# EAGLE board CT_schematic (EAGLE 7.6.0)

Size 100 x 80 mm. Coordinates in mm from the lower left corner, seen from the top.
Outline: 0,0 100,0 100,80 0,80 0,0
Copper layers (1*16): Top 0.035mm / dielectric 1.5mm / Bottom 0.035mm
Design rules "default": minimum track width 10mil, minimum drill 24mil, track to track 8mil, track to pad 8mil, pad to pad 8mil, via to via 8mil, smd to smd 8mil, copper to edge 40mil, drill to drill 8mil, minimum pad ring 10mil, minimum via ring 8mil, stop-mask expansion 4mil, vias tented up to drill 0mil, thermal gap 10mil

## Footprints (pad centres in the part's own frame; a part is rotated, then mirrored left to right if it is on the bottom)
C0603 = smd 0.8 x 0.8: 1 -0.762,0; 2 0.762,0
C0402 = smd 0.5 x 0.5: 1 -0.508,0; 2 0.508,0
C0805 = smd 1.2 x 1.3: 1 -1.016,0; 2 1.016,0
C1210 = smd 1.2 x 2.5: 1 -1.524,0; 2 1.524,0
C1206 = smd 1.3 x 1.6: 1 -1.524,0; 2 1.524,0
EXV-9H = smd 3.505 x 1.676: 1 -2.857,0; 2 2.857,0
L0603 = smd 0.8 x 0.8: 1 -0.762,0; 2 0.762,0
L1210 = smd 1.2 x 2.5: 1 -1.524,0; 2 1.524,0
PJ-037B_PACKAGE = drill 3.7 square: 1 12,0 | drill 3.2 square: 2 6,0
R0603 = smd 0.8 x 0.8: 1 -0.762,0; 2 0.762,0
LQFP176 = smd 0.3 x 1.2: 1 -10.75,-12.75; 2 -10.25,-12.75; 3 -9.75,-12.75; 4 -9.25,-12.75; 5 -8.75,-12.75; 6 -8.25,-12.75; 7 -7.75,-12.75; 8 -7.25,-12.75; 9 -6.75,-12.75; 10 -6.25,-12.75; 11 -5.75,-12.75; 12 -5.25,-12.75; 13 -4.75,-12.75; 14 -4.25,-12.75; 15 -3.75,-12.75; 16 -3.25,-12.75; 17 -2.75,-12.75; 18 -2.25,-12.75; 19 -1.75,-12.75; 20 -1.25,-12.75; 21 -0.75,-12.75; 22 -0.25,-12.75; 23 0.25,-12.75; 24 0.75,-12.75; 25 1.25,-12.75; 26 1.75,-12.75; 27 2.25,-12.75; 28 2.75,-12.75; 29 3.25,-12.75; 30 3.75,-12.75; 31 4.25,-12.75; 32 4.75,-12.75; 33 5.25,-12.75; 34 5.75,-12.75; 35 6.25,-12.75; 36 6.75,-12.75; 37 7.25,-12.75; 38 7.75,-12.75; 39 8.25,-12.75; 40 8.75,-12.75; 41 9.25,-12.75; 42 9.75,-12.75; 43 10.25,-12.75; 44 10.75,-12.75; 89 10.75,12.75; 90 10.25,12.75; 91 9.75,12.75; 92 9.25,12.75; 93 8.75,12.75; 94 8.25,12.75; 95 7.75,12.75; 96 7.25,12.75; 97 6.75,12.75; 98 6.25,12.75; 99 5.75,12.75; 100 5.25,12.75; 101 4.75,12.75; 102 4.25,12.75; 103 3.75,12.75; 104 3.25,12.75; 105 2.75,12.75; 106 2.25,12.75; 107 1.75,12.75; 108 1.25,12.75; 109 0.75,12.75; 110 0.25,12.75; 111 -0.25,12.75; 112 -0.75,12.75; 113 -1.25,12.75; 114 -1.75,12.75; 115 -2.25,12.75; 116 -2.75,12.75; 117 -3.25,12.75; 118 -3.75,12.75; 119 -4.25,12.75; 120 -4.75,12.75; 121 -5.25,12.75; 122 -5.75,12.75; 123 -6.25,12.75; 124 -6.75,12.75; 125 -7.25,12.75; 126 -7.75,12.75; 127 -8.25,12.75; 128 -8.75,12.75; 129 -9.25,12.75; 130 -9.75,12.75; 131 -10.25,12.75; 132 -10.75,12.75 | smd 1.2 x 0.3: 45 12.75,-10.75; 46 12.75,-10.25; 47 12.75,-9.75; 48 12.75,-9.25; 49 12.75,-8.75; 50 12.75,-8.25; 51 12.75,-7.75; 52 12.75,-7.25; 53 12.75,-6.75; 54 12.75,-6.25; 55 12.75,-5.75; 56 12.75,-5.25; 57 12.75,-4.75; 58 12.75,-4.25; 59 12.75,-3.75; 60 12.75,-3.25; 61 12.75,-2.75; 62 12.75,-2.25; 63 12.75,-1.75; 64 12.75,-1.25; 65 12.75,-0.75; 66 12.75,-0.25; 67 12.75,0.25; 68 12.75,0.75; 69 12.75,1.25; 70 12.75,1.75; 71 12.75,2.25; 72 12.75,2.75; 73 12.75,3.25; 74 12.75,3.75; 75 12.75,4.25; 76 12.75,4.75; 77 12.75,5.25; 78 12.75,5.75; 79 12.75,6.25; 80 12.75,6.75; 81 12.75,7.25; 82 12.75,7.75; 83 12.75,8.25; 84 12.75,8.75; 85 12.75,9.25; 86 12.75,9.75; 87 12.75,10.25; 88 12.75,10.75; 133 -12.75,10.75; 134 -12.75,10.25; 135 -12.75,9.75; 136 -12.75,9.25; 137 -12.75,8.75; 138 -12.75,8.25; 139 -12.75,7.75; 140 -12.75,7.25; 141 -12.75,6.75; 142 -12.75,6.25; 143 -12.75,5.75; 144 -12.75,5.25; 145 -12.75,4.75; 146 -12.75,4.25; 147 -12.75,3.75; 148 -12.75,3.25; 149 -12.75,2.75; 150 -12.75,2.25; 151 -12.75,1.75; 152 -12.75,1.25; 153 -12.75,0.75; 154 -12.75,0.25; 155 -12.75,-0.25; 156 -12.75,-0.75; 157 -12.75,-1.25; 158 -12.75,-1.75; 159 -12.75,-2.25; 160 -12.75,-2.75; 161 -12.75,-3.25; 162 -12.75,-3.75; 163 -12.75,-4.25; 164 -12.75,-4.75; 165 -12.75,-5.25; 166 -12.75,-5.75; 167 -12.75,-6.25; 168 -12.75,-6.75; 169 -12.75,-7.25; 170 -12.75,-7.75; 171 -12.75,-8.25; 172 -12.75,-8.75; 173 -12.75,-9.25; 174 -12.75,-9.75; 175 -12.75,-10.25; 176 -12.75,-10.75
10100565 = smd 0.8 x 2.35: 1 0,0; 2 1.25,0; 3 2.55,0; 4 4.25,0; 5 5.43,0; 6 6.68,0; 7 7.93,0; 8 9.18,0; 9 11.67,0; 10 14.18,0; 11 15.43,0; 12 16.68,0; 13 17.93,0; 14 19.18,0; 15 21.68,0 | smd 1.5 x 3.1: 16 23.495,-1.375; 20 25.685,-22.875 | smd 1.55 x 3.1: 17 -1.815,-1.375; 21 -1.815,-22.875 | drill 1.1 pad 1.1: 18 21.68,-2.375; 19 0.68,-2.375
SAMTEC_FTSH-105-01-L-DV-K = smd 0.762 x 2.794: 1 -2.54,-2.032; 2 -2.54,2.032; 3 -1.27,-2.032; 4 -1.27,2.032; 5 0,-2.032; 6 0,2.032; 7 1.27,-2.032; 8 1.27,2.032; 9 2.54,-2.032; 10 2.54,2.032
SSOP-16 = smd 1.981 x 0.356: 1 -2.464,2.223; 2 -2.464,1.587; 3 -2.464,0.953; 4 -2.464,0.318; 5 -2.464,-0.318; 6 -2.464,-0.953; 7 -2.464,-1.587; 8 -2.464,-2.223; 9 2.464,-2.223; 10 2.464,-1.587; 11 2.464,-0.953; 12 2.464,-0.318; 13 2.464,0.318; 14 2.464,0.953; 15 2.464,1.587; 16 2.464,2.223
182-009-MALE = drill 1.194 pad 1.524 octagon: 1 -5.537,10.923; 2 -2.769,10.923; 3 0,10.923; 4 2.769,10.923; 5 5.537,10.923; 6 -4.153,8.08; 7 -1.384,8.08; 8 1.384,8.08; 9 4.153,8.08 | hole 3.048: -12.446,9.501; 12.446,9.501
QFN-28 = smd 0.813 x 0.305: 1 -2.451,1.5; 2 -2.451,1; 3 -2.451,0.5; 4 -2.451,0; 5 -2.451,-0.5; 6 -2.451,-1; 7 -2.451,-1.5; 15 2.451,-1.5; 16 2.451,-1; 17 2.451,-0.5; 18 2.451,0; 19 2.451,0.5; 20 2.451,1; 21 2.451,1.5 | smd 0.305 x 0.813: 8 -1.5,-2.451; 9 -1,-2.451; 10 -0.5,-2.451; 11 0,-2.451; 12 0.5,-2.451; 13 1,-2.451; 14 1.5,-2.451; 22 1.5,2.451; 23 1,2.451; 24 0.5,2.451; 25 0,2.451; 26 -0.5,2.451; 27 -1,2.451; 28 -1.5,2.451 | smd 3.607 x 3.607: 29 0,0
SJ-43515TS-SMT-TR = smd 2.2 x 3: 1 0.6,-7.4; 4 3.4,-7.4 | smd 3 x 3: 2 12.8,-7.4; 5 17,-3 | smd 2 x 3: 3 5.3,0; 6 2.5,0 | drill 1.8: P$7 4.5,-3.69; P$8 11.54,-3.69
ABS07-32.768KHZ-7-T = smd 1.1 x 2.4: 1 -2.5,0; 2 0,0
ASFL1 = smd 1.7 x 1.5: 1 -1.27,-1.1; 2 1.27,-1.1; 3 1.27,1.1; 4 -1.27,1.1
WSON-8 = smd 0.3 x 0.6: 1 -0.75,0; 2 0.05,0; 3 0.85,0; 4 1.65,0; 5 1.65,3.8; 6 0.85,3.8; 7 0.05,3.8; 8 -0.75,3.8 | smd 3 x 2.6: PAD 0.45,1.9
SON-6 = smd 0.55 x 0.3: 1 -0.355,0.5 | smd 0.52 x 0.3: 2 -0.37,0; 3 -0.37,-0.5; 4 0.37,-0.5; 5 0.37,0; 6 0.37,0.5
SW_4-1437565-2 = smd 1.4 x 2.1: 1 -2.23,4.55; 2 -2.23,-4.55; 3 2.23,4.55; 4 2.23,-4.55
LGM67K-G1J2-24-Z = smd 0.8 x 1.4: A -2,0; C 0,0
NC7SZ125M5X = smd 1.3 x 0.7: 1 -1.3,0.95; 2 -1.3,0; 3 -1.3,-0.95; 4 1.3,-0.95; 5 1.3,0.95

## Placement (x,y rotation side)
C1  1e-06  [C0603]  -59.69,100.33 0 top  (outside the outline)
C2  1e-07  [C0603]  -63.5,100.33 0 top  (outside the outline)
C3  1e-07  [C0603]  -67.31,100.33 0 top  (outside the outline)
C4  1e-07  [C0603]  -71.12,100.33 0 top  (outside the outline)
C5  1e-07  [C0603]  -74.93,100.33 0 top  (outside the outline)
C6  1e-07  [C0603]  -78.74,100.33 0 top  (outside the outline)
C7  1e-07  [C0603]  -82.55,100.33 0 top  (outside the outline)
C8  1e-07  [C0603]  -86.36,100.33 0 top  (outside the outline)
C9  1e-07  [C0603]  -90.17,100.33 0 top  (outside the outline)
C10  1e-07  [C0603]  -93.98,100.33 0 top  (outside the outline)
C11  1e-07  [C0603]  -15.24,105.41 0 top  (outside the outline)
C12  1e-07  [C0603]  -19.05,105.41 0 top  (outside the outline)
C13  1e-07  [C0603]  -22.86,105.41 0 top  (outside the outline)
C14  1e-07  [C0603]  -26.67,105.41 0 top  (outside the outline)
C15  1e-07  [C0603]  -30.48,105.41 0 top  (outside the outline)
C16  1e-07  [C0603]  -34.29,105.41 0 top  (outside the outline)
C17  1e-07  [C0603]  -38.1,105.41 0 top  (outside the outline)
C18  4.7e-06  [C0603]  -44.45,100.33 0 top  (outside the outline)
C19  2.2e-06  [C0603]  -48.26,100.33 0 top  (outside the outline)
C20  2.2e-06  [C0603]  -52.07,100.33 0 top  (outside the outline)
C21  1e-08  [C0603]  -41.91,105.41 0 top  (outside the outline)
C22  1e-06  [C0603]  -45.72,105.41 0 top  (outside the outline)
C23  1e-11  [C0402]  -95.25,105.41 0 top  (outside the outline)
C24  1e-11  [C0402]  -15.24,110.49 0 top  (outside the outline)
C25  1e-07  [C0402]  -19.05,110.49 0 top  (outside the outline)
C26  1e-05  [C0805]  -59.69,90.17 0 top  (outside the outline)
C27  1e-07  [C0402]  -22.86,110.49 0 top  (outside the outline)
C28  1e-06  [C0603]  -49.53,105.41 0 top  (outside the outline)
C29  1e-06  [C0603]  -53.34,105.41 0 top  (outside the outline)
C30  2.2e-07  [C0603]  -55.88,100.33 0 top  (outside the outline)
C31  1e-06  [C0603]  -57.15,105.41 0 top  (outside the outline)
C32  1e-06  [C0603]  -60.96,105.41 0 top  (outside the outline)
C33  2.2e-05  [C1210]  -16.51,90.17 0 top  (outside the outline)
C34  2.2e-05  [C1210]  -22.86,90.17 0 top  (outside the outline)
C35  1e-09  [C0402]  -26.67,110.49 0 top  (outside the outline)
C36  1e-09  [C0402]  -30.48,110.49 0 top  (outside the outline)
C37  1e-07  [C0402]  -34.29,110.49 0 top  (outside the outline)
C38  1e-07  [C0402]  -38.1,110.49 0 top  (outside the outline)
C39  1e-07  [C0402]  -41.91,110.49 0 top  (outside the outline)
C40  1e-07  [C0402]  -45.72,110.49 0 top  (outside the outline)
C41  1e-07  [C0402]  -49.53,110.49 0 top  (outside the outline)
C42  1e-05  [C0805]  -64.77,90.17 0 top  (outside the outline)
C43  1e-05  [C0805]  -69.85,90.17 0 top  (outside the outline)
C44  1e-05  [C0805]  -74.93,90.17 0 top  (outside the outline)
C45  1e-05  [C0805]  -80.01,90.17 0 top  (outside the outline)
C46  1e-05  [C0805]  -85.09,90.17 0 top  (outside the outline)
C47  1e-08  [C0402]  -53.34,110.49 0 top  (outside the outline)
C48  1e-08  [C0402]  -57.15,110.49 0 top  (outside the outline)
C49  1e-08  [C0402]  -60.96,110.49 0 top  (outside the outline)
C50  1e-05  [C1206]  -41.91,90.17 0 top  (outside the outline)
C51  1e-05  [C1210]  -29.21,90.17 0 top  (outside the outline)
C52  1e-07  [C0402]  -64.77,110.49 0 top  (outside the outline)
C53  0.0001  [EXV-9H]  -35.56,82.55 0 top  (outside the outline)
C54  0.0001  [EXV-9H]  -46.99,82.55 0 top  (outside the outline)
C55  1e-08  [C0402]  -68.58,110.49 0 top  (outside the outline)
C56  1e-08  [C0402]  -72.39,110.49 0 top  (outside the outline)
F1  240.0  [L0603]  -64.77,105.41 0 top  (outside the outline)
I1  1e-05  [L1210]  -35.56,90.17 0 top  (outside the outline)
J1  PJ-037B  [PJ-037B_PACKAGE]  -83.82,58.42 0 top  (outside the outline)
R2  1000.0  [R0603]  -68.58,105.41 0 top  (outside the outline)
R4  4700.0  [R0603]  -72.39,105.41 0 top  (outside the outline)
R5  10000.0  [R0603]  -81.28,95.25 0 top  (outside the outline)
R6  10000.0  [R0603]  -86.36,95.25 0 top  (outside the outline)
R7  100000.0  [R0603]  -90.17,88.9 0 top  (outside the outline)
R8  100000.0  [R0603]  -95.25,88.9 0 top  (outside the outline)
R9  100000.0  [R0603]  -15.24,95.25 0 top  (outside the outline)
R10  100000.0  [R0603]  -20.32,95.25 0 top  (outside the outline)
R11  100000.0  [R0603]  -25.4,95.25 0 top  (outside the outline)
R12  100000.0  [R0603]  -30.48,95.25 0 top  (outside the outline)
R13  100000.0  [R0603]  -35.56,95.25 0 top  (outside the outline)
R14  100000.0  [R0603]  -40.64,95.25 0 top  (outside the outline)
R15  100000.0  [R0603]  -45.72,95.25 0 top  (outside the outline)
R16  100000.0  [R0603]  -50.8,95.25 0 top  (outside the outline)
R17  100000.0  [R0603]  -55.88,95.25 0 top  (outside the outline)
R18  10000.0  [R0603]  -91.44,95.25 0 top  (outside the outline)
R19  10000.0  [R0603]  -96.52,95.25 0 top  (outside the outline)
R20  10000.0  [R0603]  -15.24,100.33 0 top  (outside the outline)
R21  5.0  [R0603]  -76.2,105.41 0 top  (outside the outline)
R22  100000.0  [R0603]  -60.96,95.25 0 top  (outside the outline)
R23  47000.0  [R0603]  -20.32,100.33 0 top  (outside the outline)
R24  47000.0  [R0603]  -25.4,100.33 0 top  (outside the outline)
R25  47000.0  [R0603]  -30.48,100.33 0 top  (outside the outline)
R26  680.0  [R0603]  -80.01,105.41 0 top  (outside the outline)
R27  100000.0  [R0603]  -66.04,95.25 0 top  (outside the outline)
R28  2231.0  [R0603]  -83.82,105.41 0 top  (outside the outline)
R29  1000.0  [R0603]  -87.63,105.41 0 top  (outside the outline)
R30  10000.0  [R0603]  -35.56,100.33 0 top  (outside the outline)
R31  10000.0  [R0603]  -40.64,100.33 0 top  (outside the outline)
R32  9100.0  [R0603]  -91.44,105.41 0 top  (outside the outline)
R33  680000.0  [R0603]  -71.12,95.25 0 top  (outside the outline)
R34  120000.0  [R0603]  -76.2,95.25 0 top  (outside the outline)
U1  STM32F417IET6  [LQFP176]  -57.15,13.97 0 top  (outside the outline)
U2  10100565  [10100565]  -40.64,25.4 0 top  (outside the outline)
U3  FTSH-105-01-L-DV-K  [SAMTEC_FTSH-105-01-L-DV-K]  -76.2,38.1 0 top  (outside the outline)
U4  LTC2804CGN-1#PBF  [SSOP-16]  -48.26,71.12 0 top  (outside the outline)
U5  182-009-113R531  [182-009-MALE]  -36.83,35.56 0 top  (outside the outline)
U6  WM8731CLSEFL  [QFN-28]  -90.17,82.55 0 top  (outside the outline)
U7  SJ-43515TS-SMT-TR  [SJ-43515TS-SMT-TR]  -39.37,60.96 0 top  (outside the outline)
U8  SJ-43515TS-SMT-TR  [SJ-43515TS-SMT-TR]  -67.31,60.96 0 top  (outside the outline)
U9  ABS07-32.768KHZ-7-T  [ABS07-32.768KHZ-7-T]  -68.58,82.55 0 top  (outside the outline)
U10  ASFL1-12.288MHZ-EC-T  [ASFL1]  -90.17,71.12 0 top  (outside the outline)
U11  ASFL1-25MHZ-NCS  [ASFL1]  -26.67,82.55 0 top  (outside the outline)
U12  LP3878SDX-ADJ/NOPB  [WSON-8]  -69.85,68.58 0 top  (outside the outline)
U13  TPS3895ADRYR  [SON-6]  -74.93,109.22 0 top  (outside the outline)
U14  4-1437565-2  [SW_4-1437565-2]  -27.94,72.39 0 top  (outside the outline)
U15  Q65110A2395  [LGM67K-G1J2-24-Z]  -77.47,81.28 0 top  (outside the outline)
U16  nc7sz125m5x  [NC7SZ125M5X]  -46.99,88.9 0 top  (outside the outline)
U17  nc7sz125m5x  [NC7SZ125M5X]  -53.34,88.9 0 top  (outside the outline)

## Library data of the parts
C1-C56 F1 I1 J1 R2 R4-R34 U1-U17 = circuit_tree

## Nets
CLK_CRYSTAL_U1_9: C23.1 U1.9 U9.1
CLK_CRYSTAL_U1_10: C24.1 U1.10 U9.2
CLK_U1_29: U1.29 U11.3
CLK_U6_1: U6.1 U10.3
GND: C1.2 C2.2 C3.2 C4.2 C5.2 C6.2 C7.2 C8.2 C9.2 C10.2 C11.2 C12.2 C13.2 C14.2 C15.2 C16.2 C17.2 C18.2 C19.2 C20.2 C21.2 C22.2 C23.2 C24.2 C25.2 C26.2 C27.2 C28.2 C29.2 C31.2 C32.2 C36.2 C37.2 C38.2 C39.2 C40.2 C41.2 C42.2 C43.2 C44.2 C45.2 C46.2 C47.2 C48.2 C49.2 C50.2 C51.2 C52.2 C53.2 C54.2 C55.2 C56.2 J1.2 R2.2 R6.2 R21.2 R23.2 R24.2 R25.2 R29.2 R32.2 R34.2 U1.14 U1.22 U1.37 U1.48 U1.61 U1.71 U1.90 U1.102 U1.113 U1.126 U1.135 U1.148 U1.158 U2.6 U2.10 U2.12 U2.16 U2.17 U2.20 U2.21 U3.3 U3.5 U4.8 U5.5 U6.4 U6.15 U6.19 U6.25 U6.26 U6.29 U7.1 U8.1 U10.2 U11.2 U12.3 U12.PAD U13.2 U15.C U16.2 U16.3 U17.1 U17.3
NET_U1_31: R4.1 U1.31 U17.4
NET_U1_39: C21.1 C22.1 F1.1 U1.38 U1.39
NET_U1_81: C19.1 U1.81
NET_U1_125: C20.1 U1.125
NET_U1_166: R6.1 U1.166
NET_U1_171: R5.1 U1.171
NET_U1_175: U15.A
NET_U1_176: U14.3 U14.4
NET_U2_1: R9.1 U2.1
NET_U2_2: R8.1 U2.2
NET_U2_18: U2.18 U2.19
NET_U3_9: R21.1 U3.9
NET_U4_6: C28.1 U4.6
NET_U4_7: C30.1 I1.2 U4.7
NET_U4_9: C29.1 U4.9
NET_U4_10: C30.2 U4.10
NET_U4_11: R22.1 U4.11
NET_U5_2: U4.1 U5.2
NET_U5_3: U4.3 U5.3
NET_U5_7: U4.2 U5.7
NET_U5_8: U4.4 U5.8
NET_U6_9: U6.9
NET_U6_20: C41.1 C46.1 U6.20
NET_U7_2: C34.1 R24.1 U7.2
NET_U7_5: C33.1 R23.1 U7.5
NET_U7_13: C33.2
NET_U7_14: C34.2
NET_U8_5: C35.1 C36.1 R25.1 R26.1 U8.5
NET_U8_21: R26.2
NET_U8_22: C35.2
NET_U12_1: C49.1 U12.1
NET_U12_6: R28.2 R29.1 U12.6
NET_U12_8: R27.1 U12.8
NET_U13_1: R31.1 R32.1 U13.1
NET_U13_3: R33.2 R34.1 U13.3
NET_U13_4: R30.1 U13.4 U16.4 U17.2
NET_U14_1: R2.1 U14.1 U14.2
PROC_I2S2_CK: U1.79 U6.7
PROC_I2S2_EXT_SD: U1.34 U6.10
PROC_I2S2_SD: U1.35 U6.8
PROC_I2S2_WS: U1.92 U6.9 U6.11
PROC_SDIO_CK: R7.1 U1.141 U2.8
PROC_SDIO_D0: R10.1 U1.117 U2.4
PROC_SDIO_D1: R11.1 U1.118 U2.3
PROC_SDIO_D2: R12.1 U1.139 U2.15
PROC_SDIO_D3: R13.1 U1.140 U2.14
PROC_SDIO_D4: R14.1 U1.167 U2.13
PROC_SDIO_D5: R15.1 U1.168 U2.11
PROC_SDIO_D6: R16.1 U1.115 U2.7
PROC_SDIO_D7: R17.1 U1.116 U2.5
PROC_SYS_JTCK_SWCLK: R19.1 U1.137 U3.4
PROC_SYS_JTDO_SWO: U1.161 U3.6
PROC_SYS_JTMS_SWDIO: R20.1 U1.124 U3.2
PROC_UART4_RX: U1.41 U4.16
PROC_UART4_TX: U1.40 U4.14
RST_OUT_U3_JTAG_RST_B: R18.1 U3.10 U16.1
VCC_S1_8V9: C50.1 C53.1 C54.1 J1.1 R27.2 U12.4
VCC_TIER1_3V3: C1.1 C2.1 C3.1 C4.1 C5.1 C6.1 C7.1 C8.1 C9.1 C10.1 C11.1 C12.1 C13.1 C14.1 C15.1 C16.1 C17.1 C18.1 C25.1 C26.1 C27.1 C31.1 C32.1 C37.1 C38.1 C39.1 C40.1 C42.1 C43.1 C44.1 C45.1 C47.1 C48.1 C51.1 C52.1 C55.1 C56.1 F1.2 I1.1 R4.2 R5.2 R7.2 R8.2 R9.2 R10.2 R11.2 R12.2 R13.2 R14.2 R15.2 R16.2 R17.2 R18.2 R19.2 R20.2 R22.2 R28.1 R30.2 R31.2 R33.1 U1.6 U1.15 U1.23 U1.36 U1.49 U1.62 U1.72 U1.82 U1.91 U1.103 U1.114 U1.127 U1.136 U1.149 U1.159 U1.172 U2.9 U3.1 U4.5 U4.12 U6.3 U6.5 U6.12 U6.18 U10.4 U11.4 U12.5 U13.6 U16.5 U17.5

## Tracks (layer width: path | path; a pad name or v marks a point on that pad's centre or on a via)
CLK_CRYSTAL_U1_9  (2 unrouted)
CLK_CRYSTAL_U1_10  (2 unrouted)
CLK_U1_29  (1 unrouted)
CLK_U6_1  (1 unrouted)
GND  (103 unrouted)
NET_U1_31  (2 unrouted)
NET_U1_39  (4 unrouted)
NET_U1_81  (1 unrouted)
NET_U1_125  (1 unrouted)
NET_U1_166  (1 unrouted)
NET_U1_171  (1 unrouted)
NET_U1_176  (1 unrouted)
NET_U2_1  (1 unrouted)
NET_U2_2  (1 unrouted)
NET_U2_18  (1 unrouted)
NET_U3_9  (1 unrouted)
NET_U4_6  (1 unrouted)
NET_U4_7  (2 unrouted)
NET_U4_9  (1 unrouted)
NET_U4_10  (1 unrouted)
NET_U4_11  (1 unrouted)
NET_U5_2  (1 unrouted)
NET_U5_3  (1 unrouted)
NET_U5_7  (1 unrouted)
NET_U5_8  (1 unrouted)
NET_U6_20  (2 unrouted)
NET_U7_2  (2 unrouted)
NET_U7_5  (2 unrouted)
NET_U8_5  (4 unrouted)
NET_U12_1  (1 unrouted)
NET_U12_6  (2 unrouted)
NET_U12_8  (1 unrouted)
NET_U13_1  (2 unrouted)
NET_U13_3  (2 unrouted)
NET_U13_4  (3 unrouted)
NET_U14_1  (2 unrouted)
PROC_I2S2_CK  (1 unrouted)
PROC_I2S2_EXT_SD  (1 unrouted)
PROC_I2S2_SD  (1 unrouted)
PROC_I2S2_WS  (2 unrouted)
PROC_SDIO_CK  (2 unrouted)
PROC_SDIO_D0  (2 unrouted)
PROC_SDIO_D1  (2 unrouted)
PROC_SDIO_D2  (2 unrouted)
PROC_SDIO_D3  (2 unrouted)
PROC_SDIO_D4  (2 unrouted)
PROC_SDIO_D5  (2 unrouted)
PROC_SDIO_D6  (2 unrouted)
PROC_SDIO_D7  (2 unrouted)
PROC_SYS_JTCK_SWCLK  (2 unrouted)
PROC_SYS_JTDO_SWO  (1 unrouted)
PROC_SYS_JTMS_SWDIO  (2 unrouted)
PROC_UART4_RX  (1 unrouted)
PROC_UART4_TX  (1 unrouted)
RST_OUT_U3_JTAG_RST_B  (2 unrouted)
VCC_S1_8V9  (5 unrouted)
VCC_TIER1_3V3  (89 unrouted)